# Altium PCB DMXController.PcbDoc
Units mm, origin at the board's own origin, x right, y up, seen from the top; angles counter-clockwise.
Board outline 35 x 14 mm, 2 copper layers (Top Layer, Bottom Layer); 13 components, 13 nets, 82 pads, 17 vias.
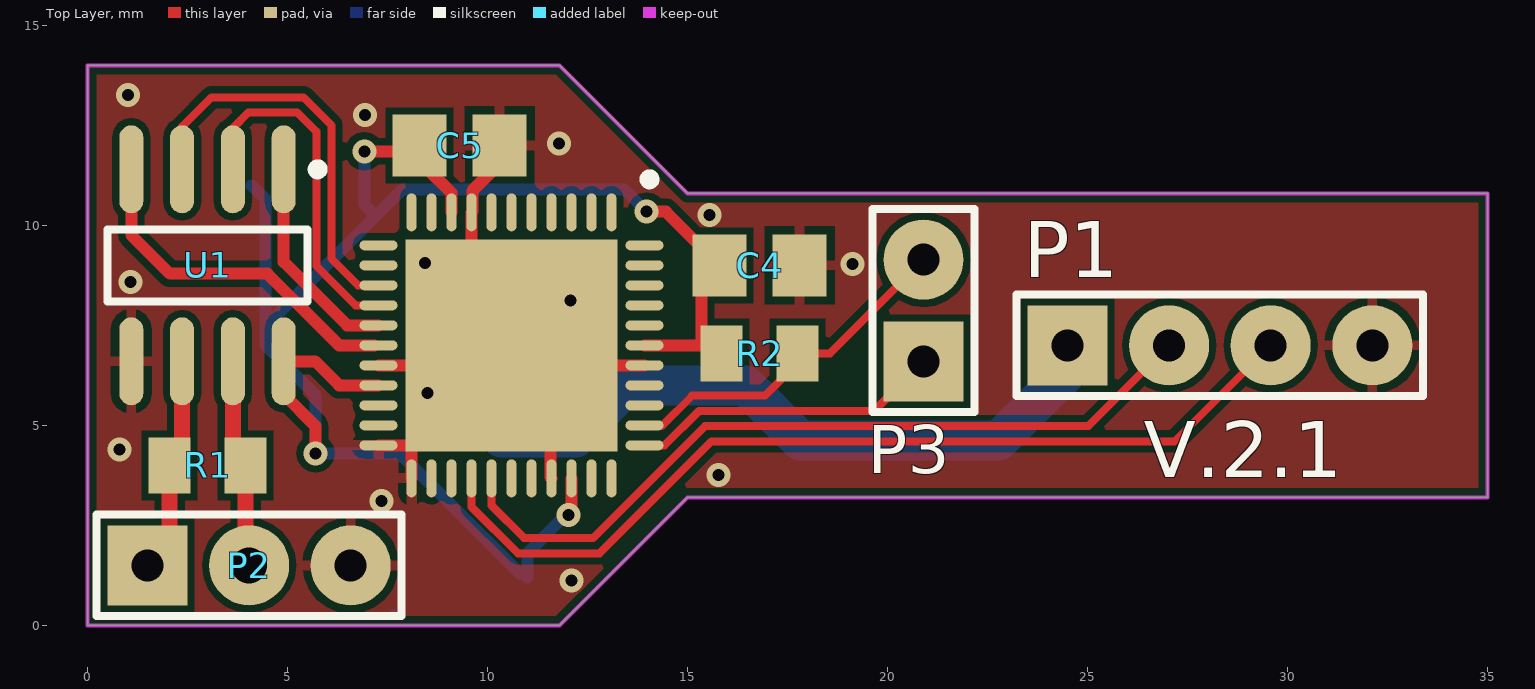
[diagram p0: Top Layer view]
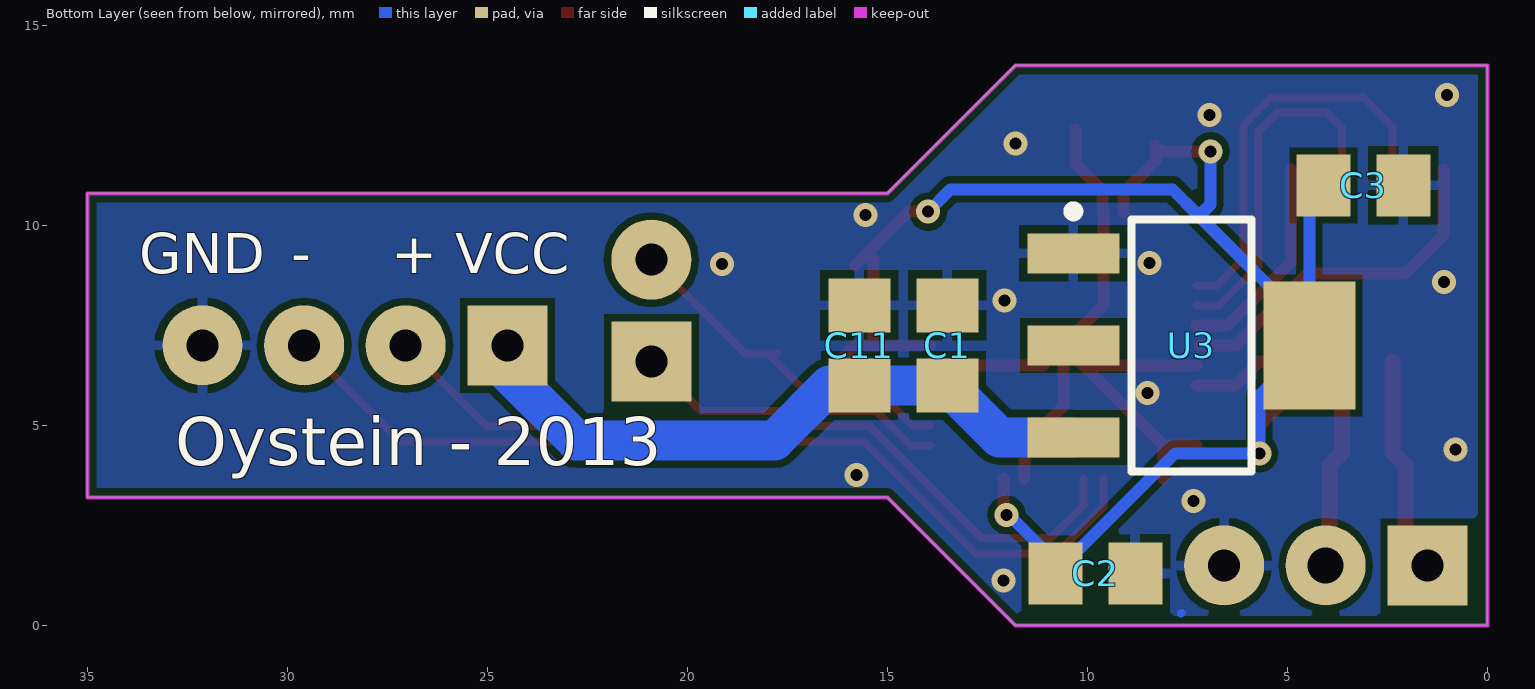
[diagram p1: Bottom Layer view, seen from below]

## Layer stack, top to bottom
Top Solder: solder mask 0.0102, Solder Resist, Dk 3.5
Top Layer: signal copper 0.0356
Dielectric1: dielectric 0.32, FR-4, Dk 4.8
Bottom Layer: signal copper 0.0356
Bottom Solder: solder mask 0.0102, Solder Resist, Dk 3.5

## Board outline
0,0 0,14 11.8,14 15,10.8 35,10.8 35,3.2 15,3.2 11.8,0

## Design rules (kind name [scope] priority, off if disabled: settings)
Clearance [All] p1: gap=0.18 ignorepadtopadclearanceinfootprint=FALSE except(0: Arc-Hole Track-Hole SMDPad-Hole THPad-Hole Via-Hole Fill-Hole Poly-Hole Region-Hole Text-Hole)
MinimumSolderMaskSliver [All] p1: minsoldermaskwidth=0.1
PlaneClearance [All] p1: clearance=0.3
PlaneConnect [All] p1: planeconnectstyle=Relief reliefexpansion=0.508 reliefentries=4 reliefconductorwidth=0.254 reliefairgap=0.2
PolygonConnect PolygonConnect_GNDVIA [isvia vs InNet('GND')] p1: connectstyle=Direct reliefconductorwidth=0.254 reliefentries=4 polygonreliefangle="90 Angle" airgapwidth=0.2
PolygonConnect [All] p2: connectstyle=Relief reliefconductorwidth=0.254 reliefentries=4 polygonreliefangle="90 Angle" airgapwidth=0.2
RoutingVias [All] p1: holewidth=0.3 width=0.6 viastyle="Through Hole" minholewidth=0.2 minwidth=0.6 maxholewidth=0.9 maxwidth=1
SolderMaskExpansion [All] p1: expansion=0
Width [All] p1: maxlimit=2 minlimit=0.2 preferedwidth=0.4
27 further rules are at their usual default settings.

## Components (designator, comment, footprint, x,y, rotation, side; value= is the part's Value field where it differs from the comment)
C1 "10u" CAPC0805(2012)100_M 13.5,7 r270 bottom value=1uF
C2 "22u" CAPC0805(2012)100_M 9.8,1.3 r0 bottom value=1uF
C3 "100n" CAPC0805(2012)100_M 3.1,11 r0 bottom value=1uF
C4 "100n" CAPC0805(2012)100_M 16.8,9 r180 top value=1uF
C5 "100n" CAPC0805(2012)100_M 9.3,12 r180 top value=1uF
C11 "10u" CAPC0805(2012)100_M 15.7,7 r270 bottom value=1uF
P1 "Header 4" HDR1X4 24.5,7 r0 top
P2 "Header 3" HDR1X3 1.5,1.5 r0 top
P3 "Header 2" HDR1X2 20.9,6.6 r90 top
R1 "120R 5% 0805(2012)" RESC0805(2012)_N 3,4 r0 top value="120.00 Ohm"
R2 "10k" RESC0805(2012)_N 16.8,6.8 r0 top value="120.00 Ohm"
U1 "SP3485" SOIC8 3,9 r270 top
U3 "AP1117" SOT-223 7.4,7 r180 bottom

## Footprints (in the part's own frame and the unit in brackets; to place one, negate y for a bottom-side part, rotate by r counter-clockwise, add the part's x,y. Pads: shape width x height; smd on the part's side, far side on the other; paste and mask are expansions set on the pad)
CAPC0805(2012)100_M [mm] "Chip Capacitor, Body 2.0x1.2mm, Height 1.0mm, IPC Low Density"
  rect 1.35x1.55 smd: 1(-1,0) 2(1,0)
  body extent -1.1,-0.72 1.1,0.72, height 1
HDR1X2 [mm] "Connector; Header; 2 Position"
  rect 2x2 hole 0.8: 1(0,0)
  round 2 hole 0.8: 2(2.54,0)
  silkscreen extent -1.27,-1.27 3.81,1.27
HDR1X3 [mm] "Connector; Header; 3 Position"
  rect 2x2 hole 0.8: 1(0,0)
  round 2 hole 0.9: 2(2.54,0)
  round 2 hole 0.8: 3(5.08,0)
  silkscreen extent -1.27,-1.27 6.35,1.27
HDR1X4 [mm] "Connector; Header; 4 Position"
  rect 2x2 hole 0.8: 1(0,0)
  round 2 hole 0.8: 2(2.54,0) 3(5.08,0) 4(7.62,0)
  silkscreen extent -1.27,-1.27 8.89,1.27
RESC0805(2012)_N [mm] "Chip Resistor, Body 2.0x1.3mm, IPC Medium Density"
  rect 1.05x1.4 smd: 1(-0.95,0) 2(0.95,0)
  body extent -1.1,-0.67 1.1,0.68, height 0.7
SOIC8 [mm] "SOIC, 8-Leads, Body 4,90x3,90mm, Pitch 1,27mm, IPC Medium Density"
  oval 2.2x0.6 smd: 1(-2.4,1.905) 2(-2.4,0.635) 3(-2.4,-0.635) 4(-2.4,-1.905) 5(2.4,-1.905) 6(2.4,-0.635) 7(2.4,0.635) 8(2.4,1.905)
  silkscreen extent -2.52,-2.5 0.9,2.88, body extent -2,-2.5 2,2.5, height 1.5
SOT-223 [mm] "SOT223, 4-Leads, Body 6,50x7,00mm (avg), Pitch 2,30mm, IPC Medium Density"
  rect 2.3x1 smd: 1(-2.95,2.3) 2(-2.95,0) 3(-2.95,-2.3)
  rect 2.3x3.2 smd: 4(2.95,0)
  silkscreen extent -3.08,-3.15 1.5,3.47, body extent -1.65,-3.15 1.65,3.15, height 1.8

## Part data
C1 C2 C3 C4 C5 C11: library part CMP-1036-04739-1, "CAP 1uF 10V ±10% 0805 (2012 Metric) Thickness 1mm SMD", Case-EIA=0805, Case-Metric=2012, Rated Voltage="10 V", Tolerance=±10%, Max Thickness="1 mm", Technology=SMT
P1: "Header, 4-Pin", LatestRevisionDate=17-Jul-2002, LatestRevisionNote="Re-released for DXP Platform.", Publisher="Altium Limited"
P2: "Header, 3-Pin", LatestRevisionDate=17-Jul-2002, LatestRevisionNote="Re-released for DXP Platform.", Publisher="Altium Limited"
P3: "Header, 2-Pin", LatestRevisionDate=17-Jul-2002, LatestRevisionNote="Re-released for DXP Platform.", Publisher="Altium Limited"
R1 R2: library part CMP-1013-00052-1, "120R 0.125W 5% 0805 (2012 Metric)  SMD", Case-EIA=0805, Case-Metric=2012, Power="0.125 W", Tolerance="5 %", Technology=SMT

## Free pads (board coordinates)
  oval 0.25x0.95 smd: 1(13.1,10.325) 2(12.6,10.325) 3(12.1,10.325) 4(11.6,10.325) 5(11.1,10.325) 6(10.6,10.325) 7(10.1,10.325) 8(9.6,10.325) 9(9.1,10.325) 10(8.6,10.325) 11(8.1,10.325) 23(8.1,3.675) 24(8.6,3.675) 25(9.1,3.675) 26(9.6,3.675) 27(10.1,3.675) 28(10.6,3.675) 29(11.1,3.675) 30(11.6,3.675) 31(12.1,3.675) 32(12.6,3.675) 33(13.1,3.675)
  oval 0.95x0.25 smd: 12(7.275,9.5) 13(7.275,9) 14(7.275,8.5) 15(7.275,8) 16(7.275,7.5) 17(7.275,7) 18(7.275,6.5) 19(7.275,6) 20(7.275,5.5) 21(7.275,5) 22(7.275,4.5) 34(13.925,4.5) 35(13.925,5) 36(13.925,5.5) 37(13.925,6) 38(13.925,6.5) 39(13.925,7) 40(13.925,7.5) 41(13.925,8) 42(13.925,8.5) 43(13.925,9) 44(13.925,9.5)
  rect 5.3x5.3 smd: 45(10.6,7)

## Via types
v1: diameter 0.6, hole 0.3, Top Layer to Bottom Layer, tented both sides, 13 vias
v2: diameter 0.6, hole 0.3, Top Layer to Bottom Layer, 4 vias

## Nets (pads, with @x,y where several pads share a name; then routed paths per layer and width w, separated by ;. In a path a pad name is that pad's centre, name@x,y a point inside that pad or via, vN(x,y) a via of type N, cw(c..) or ccw(c..) an arc to the next point about the centre after c; other vN are vias at no path point)
3.3V: C2.2 C3.2 C4.2 C5.2 pad.9 pad.19 pad.31 pad.39 R2.1 U1.8 U3.4 | length 45.4
  Top Layer w0.3: v2(5.7,4.3) 5.7,4.978 4.905,5.773 U1.8 5.69,6.6 6.29,6 pad.19 ; v1(6.92,11.85) 8.15,11.85 C5.2 8.3,11.6 8.77,11.13 8.788,11.13 9.1,10.818 pad.9 ; v2(12.02,2.76) 12.1,2.84 pad.31 ; pad.39 R2.1@15.35,7 ; v1(13.98,10.34) 14.46,10.34 C4.2 ; C4.2@15.35,9.15 R2.1@15.35,7 ; R2.1@16.225,6.575 15.925,6.875 15.8,7 R2.1@15.35,7
  Bottom Layer w0.3: C3.2 4.45,10.65 U3.4@4.45,7.476 ; v1@6.92,11.94 v1(6.92,11.85) 6.92,10.52 7.207,10.233 ; C2.2 7.8,4.3 v2(5.7,4.3) 5.7,5.75 U3.4 U3.4@4.45,7.476 ; C2.2@11,1.2 11,1.8 11.96,2.76 v2(12.02,2.76) ; v1(13.98,10.34) 13.42,10.9 7.874,10.9 7.207,10.233 ; U3.4@4.45,7.476 7.207,10.233
5V: C1.2 C11.2 P1.1 U3.3 | length 16.6
  Bottom Layer w1: U3.3 12.2,4.7 C1.2 C11.2 16.44,6 17.82,4.62 22.78,4.62 24.5,6.34 P1.1
D+: P1.2 pad.27 | length 20
  Top Layer w0.2: pad.27 10.1,2.997 10.917,2.18 12.643,2.18 15.443,4.98 25.02,4.98 P1.2
D-: P1.3 pad.26 | length 23.3
  Top Layer w0.2: pad.26 9.6,2.96 10.76,1.8 12.8,1.8 15.6,4.6 27.18,4.6 P1.3
DE: pad.14 U1.3 | length 10.2
  Top Layer w0.2: U1.3 2.365,12.465 3.1,13.2 5.4,13.2 6.1,12.5 6.1,9.166 6.766,8.5 pad.14
DMX_RX: pad.16 U1.1 | length 5.3
  Top Layer w0.3: U1.1 4.905,9.088 6.493,7.5 6.5,7.5 pad.16
DMX_TX: pad.17 U1.4 | length 8.9
  Top Layer w0.3: U1.4 1.095,9.755 2.06,8.79 4.496,8.79 6.286,7 6.707,7 pad.17@7.175,7
GND: C1.1 C2.1 C3.1 C4.1 C5.1 C11.1 P1.4 P2.3 pad.8 pad.18 pad.22 pad.23 pad.30 pad.38 pad.45 U1.5 U3.1 | length 20.7
  Top Layer w0.3: pad.22 pad.45@8.1,4.5 ; pad.18 pad.45@10.1,6.5 ; pad.23 pad.45@8.1,4.5 ; C5.1@10.3,12.4 10.3,11.547 9.625,10.872 9.625,10.35 pad.8 9.6,8 pad.45 ; pad.45@11.1,6.5 pad.38 ; pad.30 11.575,3.7 11.575,4.5 10.6,5.475 pad.45 ; pad.45@8.1,4.5 pad.45@10.1,6.5 ; pad.45@10.1,6.5 pad.45
  Bottom Layer w0.2: 7.65,0.31 7.66,0.3
  other v1: 12.1,1.12 7.35,3.11 15.77,3.76 8.5,5.81 12.07,8.12 1.08,8.58 19.13,9.03 15.55,10.26 11.79,12.05 6.94,12.76 1.01,13.26
  other v2: 0.8,4.4 8.44,9.06
NetP2_1: P2.1 R1.1 U1.6 | length 5.5
  Top Layer w0.4: P2.1@1.4,1.5 2.05,2.15 R1.1 2.365,4.315 U1.6
NetP2_2: P2.2 R1.2 U1.7 | length 5.2
  Top Layer w0.4: U1.7 3.635,4.315 R1.2 3.95,1.51 P2.2@3.94,1.5
PDI_CLOCK: P3.2 pad.35 R2.2 | length 9.5
  Top Layer w0.2: pad.35 14.376,5 15.116,5.74 16.94,5.74 R2.2@18,6.8 ; R2.2 R2.2@18,6.8 ; P3.2@20.34,9.14 P3.2 18.56,6.8 R2.2@18,6.8
PDI_DATA: P3.1 pad.34 | length 7.8
  Top Layer w0.2: pad.34 14.425,4.5 15.285,5.36 19.66,5.36 P3.1
RE: pad.15 U1.2 | length 8.8
  Top Layer w0.2: U1.2 3.635,12.435 4.02,12.82 5.243,12.82 5.72,12.343 5.72,8.98 6.7,8 pad.15
pads on no net: U3.2

## Polygon pours and split planes (outlines as drawn)
GND on Bottom Layer "Top Layer-No Net" (solid, pour order 14): 0.2,13.8 11.8,13.8 14.9,10.6 34.8,10.6 34.8,3.4 14.9,3.4 11.8,0.2 0.2,0.2
GND on Top Layer "Top Layer-No Net" (solid, pour order 12): 0.2,13.8 11.8,13.8 14.9,10.6 34.8,10.6 34.8,3.4 14.9,3.4 11.8,0.2 0.2,0.2

## Keep-outs
Keep-Out Layer:
  the board outline again, w0.1

## Silkscreen, mask and mechanical layers (free items; w line width, h text height)
Top Overlay:
  circle w0.25: c14.05,11.15 r0.125
  text "V.2.1" at 26.4,3.7 h1.4
Bottom Overlay:
  text "VCC" at 25.8,8.8 h1
  text "+" at 27.4,8.8 h1
  text "-" at 29.9,8.8 h1
  text "GND" at 33.7,8.8 h1
  text "Oystein - 2013" at 32.8,4 h1.2
Mechanical 1:
  the board outline again, w0.1
Mechanical 2:
  the board outline again, w0.1
Mechanical 13:
  circle w0.1: c13.25,9.65 r0.5